# EAGLE board LickportPCB (EAGLE 9.7.0)
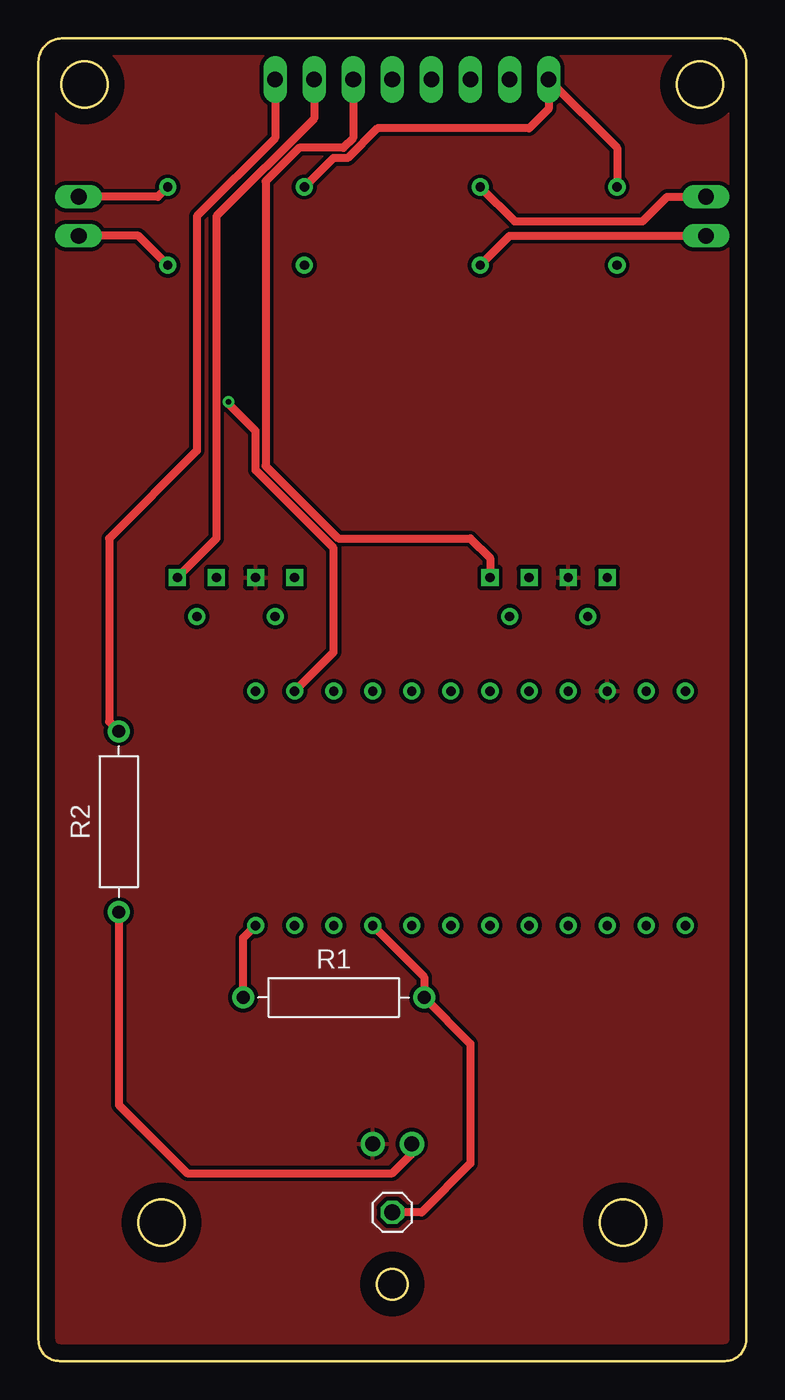
[diagram p0: board, top side]
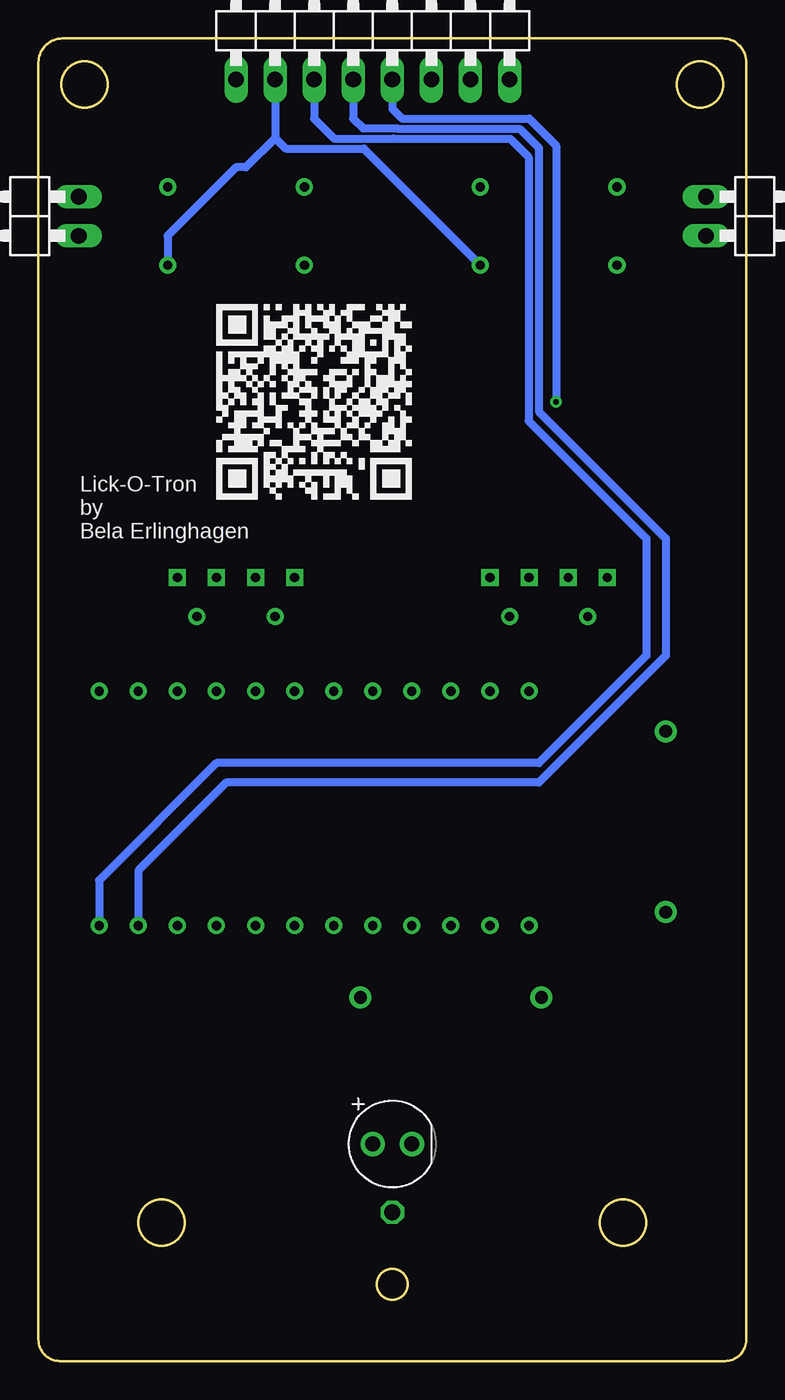
[diagram p1: board, bottom side, seen from below]

Size 46 x 86 mm. Coordinates in mm from the lower left corner, seen from the top.
Outline: 0,84.47 0,1.37 arc90 1.37,0 44.62,0 arc90 46,1.38 46,1.62 46,84.43 arc90 44.43,86 1.53,86 arc90 0,84.47
Outline: circle at 23,5 radius 1
Outline: circle at 38,9 radius 1.5
Outline: circle at 43,83 radius 1.5
Outline: circle at 8,9 radius 1.5
Outline: circle at 3,83 radius 1.5
Copper layers (1*16): Top 0.035mm / dielectric 1.5mm / Bottom 0.035mm
Design rules "Fusion Electronics Design Rules": minimum track width 6mil, minimum drill 0.35mm, track to track 6mil, track to pad 6mil, pad to pad 6mil, via to via 6mil, smd to smd 6mil, copper to edge 40mil, drill to drill 6mil, minimum pad ring 10mil, minimum via ring 8mil, stop-mask expansion 4mil, vias tented up to drill 9999mil, thermal gap 10mil

## Footprints (pad centres in the part's own frame; a part is rotated, then mirrored left to right if it is on the bottom)
LEDRD254W60D565H860B_B = drill 0.981 pad 1.581: A -1.27,0; C 1.27,0
1X08/90 = drill 1.016 long: 1 -8.89,-3.81; 2 -6.35,-3.81; 3 -3.81,-3.81; 4 -1.27,-3.81; 5 1.27,-3.81; 6 3.81,-3.81; 7 6.35,-3.81; 8 8.89,-3.81
1X02/90 = drill 1.016 long: 1 -1.27,-3.81; 2 1.27,-3.81
1X01 = drill 1.016 octagon: 1 0,0
RESAD1176W63L850D250B = drill 0.83 pad 1.43: 1 -5.88,0; 2 5.88,0
MOSFET_MODULE = drill 0.6 square: P$1 -2.54,3.81; P$2 0,3.81; P$3 2.54,3.81; P$4 5.08,3.81 | drill 0.6: P$5 -1.27,1.27; P$6 3.81,1.27; P$7 5.715,24.13; P$8 5.715,29.21; P$9 -3.175,24.13; P$10 -3.175,29.21
JOY_IT_PRO_MICRO = drill 0.6: P$1 -10.16,27.94; P$2 -10.16,25.4; P$3 -10.16,22.86; P$4 -10.16,20.32; P$5 -10.16,17.78; P$6 -10.16,15.24; P$7 -10.16,12.7; P$8 -10.16,10.16; P$9 -10.16,7.62; P$10 -10.16,5.08; P$11 -10.16,2.54; P$12 -10.16,0; P$13 5.08,0; P$14 5.08,2.54; P$15 5.08,5.08; P$16 5.08,7.62; P$17 5.08,10.16; P$18 5.08,12.7; P$19 5.08,15.24; P$20 5.08,17.78; P$21 5.08,20.32; P$22 5.08,22.86; P$23 5.08,25.4; P$24 5.08,27.94

## Placement (x,y rotation side)
D1  LED-BLUE  [LEDRD254W60D565H860B_B]  23,14.11 0 bottom
JP1  PINHD-1X8/90  [1X08/90]  24.27,87.14 0 bottom
JP2  PINHD-1X2/90  [1X02/90]  -1.19,74.44 270 bottom
JP3  PINHD-1X2/90  [1X02/90]  47.19,74.44 90 bottom
JP6  PINHD-1X1  [1X01]  23,9.67 0 top
R1  [RESAD1176W63L850D250B]  19.19,23.64 0 top
R2  [RESAD1176W63L850D250B]  5.22,35.07 90 top
U$1  MOSFET_MODULE  [MOSFET_MODULE]  11.57,47.14 0 top
U$2  MOSFET_MODULE  [MOSFET_MODULE]  31.89,47.14 0 top
U$3  JOY_IT_PRO_MICRO  [JOY_IT_PRO_MICRO]  14.11,33.4 270 top

## Library data of the parts
D1 = Opto-Electronic
JP1 = LickportLibrary; CATEGORY: Headers; DESCRIPTION: Header, Right Angle, 8 Position; MANUFACTURER: Generic; MPN: Generic; OPERATING_TEMPERATURE: Generic; PART_STATUS: Active; PITCH: 0.100" (2.54mm); ROHS_COMPLIANCE: Generic; SERIES: Generic; SUB-CATEGORY: Headers, Male Pins; TYPE: Board to Board or Cable, Unshrouded, Through Hole, Right Angle
JP2 JP3 = LickportLibrary; CATEGORY: Headers; DESCRIPTION: Header, Right Angle, 2 Position; MANUFACTURER: Generic; MPN: Generic; OPERATING_TEMPERATURE: Generic; PART_STATUS: Active; PITCH: 0.100" (2.54mm); ROHS_COMPLIANCE: Generic; SERIES: Generic; SUB-CATEGORY: Headers, Male Pins; TYPE: Board to Board or Cable, Unshrouded, Through Hole, Right Angle
JP6 = Connector; CATEGORY: Headers; DESCRIPTION: Header, Straight, 1 Position; MANUFACTURER: Generic; MPN: Generic; OPERATING_TEMPERATURE: Generic; PART_STATUS: Active; PITCH: 0.100" (2.54mm); ROHS_COMPLIANCE: Generic; SERIES: Generic; SUB-CATEGORY: Headers, Male Pins; TYPE: Board to Board or Cable, Unshrouded, Through Hole, Straight
R1 R2 = LickportLibrary; CATEGORY: Resistor; SUB-CATEGORY: Fixed
U$1-U$3 = LickportLibrary

## Nets
GNDARDUINO: D1.C U$1.P$3 U$2.P$3 U$3.P$3
LEDINPUT: JP1.8 R2.2
N$9: JP2.1 U$1.P$10
N$10: JP2.2 U$1.P$9
N$17: JP3.2 U$2.P$10
N$18: JP3.1 U$2.P$9
N$24: D1.A R2.1
N$26: R1.1 U$3.P$13
N$27: JP6.1 R1.2 U$3.P$16
OUTPUT1ARDUINO: JP1.5 U$3.P$11
PWMINPUTPUMPLEFT: JP1.7 U$1.P$1
PWMINPUTPUMPRIGHT: JP1.6 U$2.P$1
VIN+ARDUINO: JP1.3 U$3.P$24
VIN+PUMP: JP1.1 U$1.P$8 U$2.P$8
VIN-ARDUINO: JP1.4 U$3.P$23
VIN-PUMP: JP1.2 U$1.P$7 U$2.P$7

## Tracks (layer width: path | path; a pad name or v marks a point on that pad's centre or on a via)
GNDARDUINO
  pour Top (isolate 0.254): 0.08,0.08 45.92,0.08 45.92,85.92 0.08,85.92
LEDINPUT
  Top 0.508: JP1.8 15.38,79.52 10.3,74.44 10.3,59.2 4.59,53.48 4.59,41.59 R2.2
N$9
  Top 0.508: U$1.P$10 7.76,75.71 JP2.1
N$10
  Top 0.508: U$1.P$9 6.49,73.17 JP2.2
N$17
  Top 0.508: JP3.2 40.87,75.71 39.27,74.11 30.95,74.11 U$2.P$10
N$18
  Top 0.508: U$2.P$9 30.62,73.17 JP3.1
N$24
  Top 0.508: R2.1 5.22,16.66 9.66,12.21 23,12.21 24.27,13.48 D1.A
N$26
  Top 0.508: R1.1 13.31,27.52 U$3.P$13
N$27
  Top 0.508: U$3.P$16 25.07,24.98 R1.2 28.08,20.63 28.08,12.84 24.91,9.67 JP6.1
OUTPUT1ARDUINO  (via drill 0.35)
  Top 0.508: U$3.P$11 19.19,46.1 19.19,52.85 14.11,57.93 14.11,60.47 12.36,62.22 v12.36,62.38
  Bottom 0.508: JP1.5 23,81.42 22.36,80.79 14.11,80.79 12.36,79.03 v12.36,62.38
PWMINPUTPUMPLEFT
  Top 0.508: JP1.7 17.92,80.79 11.57,74.44 11.57,53.48 U$1.P$1
PWMINPUTPUMPRIGHT
  Top 0.508: JP1.6 20.46,79.52 19.82,78.89 16.95,78.89 14.77,76.71 14.77,58.2 19.49,53.48 28.08,53.48 29.35,52.22 U$2.P$1
VIN+ARDUINO
  Bottom 0.508: JP1.3 28.08,80.79 26.79,79.5 22.94,79.5 22.91,79.47 15.33,79.47 14.13,78.28 14.13,61.13 6.49,53.48 6.49,45.87 13.47,38.88 34.43,38.88 42.05,31.26 U$3.P$24
VIN+PUMP
  Top 0.508: U$2.P$8 37.61,78.89 JP1.1 33.16,81.42 31.89,80.16 22.03,80.16 20.1,78.22 19.16,78.22 U$1.P$8
VIN-ARDUINO
  Bottom 0.508: JP1.4 25.54,80.79 24.91,80.16 22.66,80.16 22.64,80.13 14.72,80.13 13.47,78.89 13.47,61.74 5.22,53.48 5.22,45.87 13.47,37.61 33.8,37.61 39.51,31.9 U$3.P$23
VIN-PUMP
  Bottom 0.508: JP1.2 30.62,79.52 | 30.62,79.52 32.52,77.61 33.16,77.61 37.61,73.17 U$2.P$7 | U$1.P$7 24.85,78.83 29.93,78.83 30.62,79.52

## Text on the board
bPlace: Lick-O-Tron / by / Bela Erlinghagen